# EAGLE board placas_leds_painel (EAGLE 7.7.0)
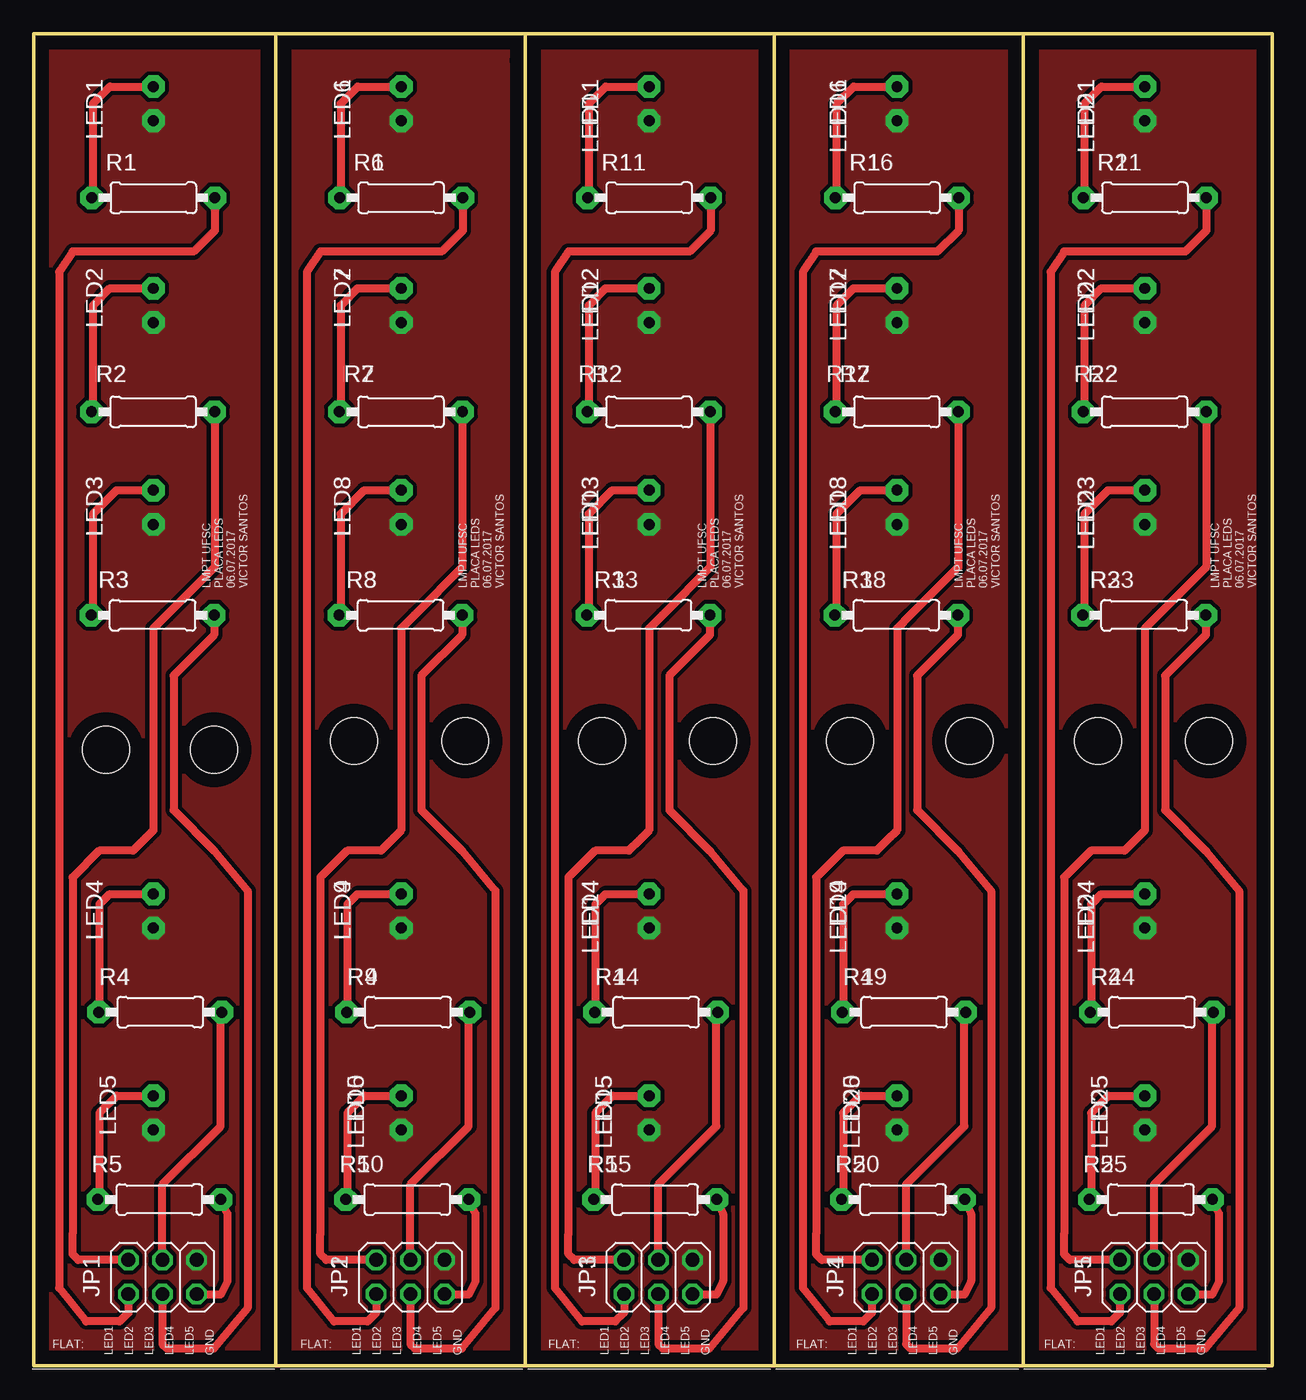
[diagram p0: board, top side]
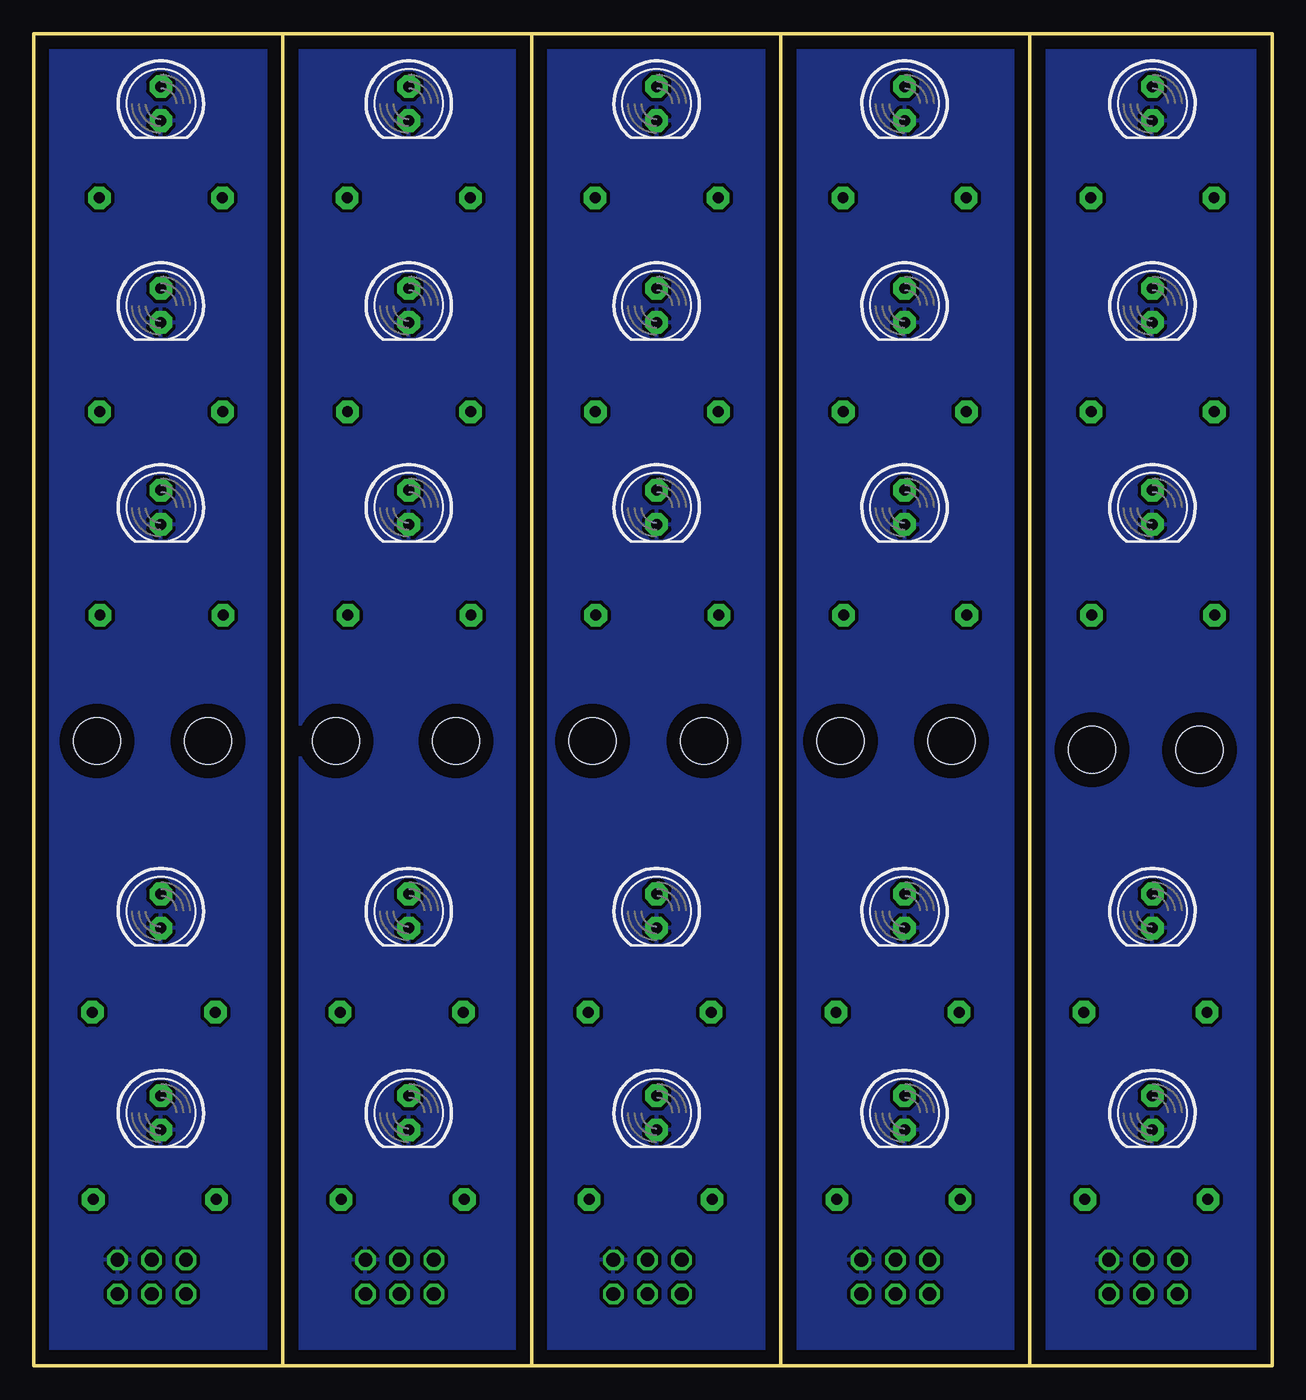
[diagram p1: board, bottom side, seen from below]

Size 92 x 99 mm. Coordinates in mm from the lower left corner, seen from the top.
Outline: 18,0 0,0 0,99 18,99
Outline: 18,0 36.5,0
Outline: 36.5,0 55,0
Outline: 55,0 73.5,0
Outline: 73.5,0 92,0 92,99 73.5,99
Outline: 18,99 37,99
Outline: 37,99 55,99
Outline: 55,99 73,99
Outline: 73,99 73.5,99
Outline: 18,99 18,0
Outline: 37,99 36.5,99 36.5,97 36.5,0
Outline: 36.5,0 55,0
Outline: 55,0 55,99
Outline: 73,99 73.5,99
Outline: 73.5,99 73.5,0
Copper layers (1*16): Top 0.035mm / dielectric 1.5mm / Bottom 0.035mm
Design rules "default": minimum track width 10mil, minimum drill 24mil, track to track 8mil, track to pad 8mil, pad to pad 8mil, via to via 8mil, smd to smd 8mil, copper to edge 40mil, drill to drill 8mil, minimum pad ring 10mil, minimum via ring 8mil, stop-mask expansion 4mil, vias tented up to drill 0mil, thermal gap 10mil
Holes 3.5 mm at 5.39,45.8 13.39,45.8 23.8,46.44 32.06,46.44 42.22,46.44 50.48,46.44 60.63,46.44 69.53,46.44 79.05,46.44 87.31,46.44

## Footprints (pad centres in the part's own frame; a part is rotated, then mirrored left to right if it is on the bottom)
2X03 = drill 1.016 octagon: 1 -2.54,-1.27; 2 -2.54,1.27; 3 0,-1.27; 4 0,1.27; 5 2.54,-1.27; 6 2.54,1.27
LED5MM = drill 0.813 pad 1.676 octagon: A -1.27,0; K 1.27,0
0207/9 = drill 0.813 pad 1.676 octagon: 1 -4.572,0; 2 4.572,0

## Placement (x,y rotation side)
JP1  [2X03]  9.57,6.61 0 top
JP2  [2X03]  27.98,6.61 0 top
JP3  [2X03]  46.4,6.61 0 top
JP4  [2X03]  64.81,6.61 0 top
JP5  [2X03]  83.23,6.61 0 top
LED1  [LED5MM]  8.89,93.8 270 bottom
LED2  [LED5MM]  8.89,78.8 270 bottom
LED3  [LED5MM]  8.89,63.8 270 bottom
LED4  [LED5MM]  8.89,33.8 270 bottom
LED5  [LED5MM]  8.89,18.8 270 bottom
LED6  [LED5MM]  27.3,93.8 270 bottom
LED7  [LED5MM]  27.3,78.8 270 bottom
LED8  [LED5MM]  27.3,63.8 270 bottom
LED9  [LED5MM]  27.3,33.8 270 bottom
LED10  [LED5MM]  27.3,18.8 270 bottom
LED11  [LED5MM]  45.72,93.8 270 bottom
LED12  [LED5MM]  45.72,78.8 270 bottom
LED13  [LED5MM]  45.72,63.8 270 bottom
LED14  [LED5MM]  45.72,33.8 270 bottom
LED15  [LED5MM]  45.72,18.8 270 bottom
LED16  [LED5MM]  64.14,93.8 270 bottom
LED17  [LED5MM]  64.14,78.8 270 bottom
LED18  [LED5MM]  64.14,63.8 270 bottom
LED19  [LED5MM]  64.14,33.8 270 bottom
LED20  [LED5MM]  64.14,18.8 270 bottom
LED21  [LED5MM]  82.55,93.8 270 bottom
LED22  [LED5MM]  82.55,78.8 270 bottom
LED23  [LED5MM]  82.55,63.8 270 bottom
LED24  [LED5MM]  82.55,33.8 270 bottom
LED25  [LED5MM]  82.55,18.8 270 bottom
R1  [0207/9]  8.89,86.8 180 top
R2  [0207/9]  8.87,70.9 180 top
R3  [0207/9]  8.84,55.78 0 top
R4  [0207/9]  9.41,26.28 0 top
R5  [0207/9]  9.34,12.36 0 top
R6  [0207/9]  27.3,86.8 180 top
R7  [0207/9]  27.29,70.9 180 top
R8  [0207/9]  27.25,55.78 0 top
R9  [0207/9]  27.82,26.28 0 top
R10  [0207/9]  27.75,12.36 0 top
R11  [0207/9]  45.72,86.8 180 top
R12  [0207/9]  45.7,70.9 180 top
R13  [0207/9]  45.67,55.78 0 top
R14  [0207/9]  46.24,26.28 0 top
R15  [0207/9]  46.17,12.36 0 top
R16  [0207/9]  64.14,86.8 180 top
R17  [0207/9]  64.11,70.9 180 top
R18  [0207/9]  64.08,55.78 0 top
R19  [0207/9]  64.66,26.28 0 top
R20  [0207/9]  64.58,12.36 0 top
R21  [0207/9]  82.55,86.8 180 top
R22  [0207/9]  82.53,70.9 180 top
R23  [0207/9]  82.5,55.78 0 top
R24  [0207/9]  83.07,26.28 0 top
R25  [0207/9]  83,12.36 0 top

## Library data of the parts
JP1-JP5 = pinhead
LED1-LED25 R1-R25 = adafruit

## Nets
GND: JP1.6 LED1.K LED2.K LED3.K LED4.K LED5.K
GND1: JP2.6 LED6.K LED7.K LED8.K LED9.K LED10.K
GND2: JP3.6 LED11.K LED12.K LED13.K LED14.K LED15.K
GND3: JP4.6 LED16.K LED17.K LED18.K LED19.K LED20.K
GND4: JP5.6 LED21.K LED22.K LED23.K LED24.K LED25.K
LED1: JP1.1 R1.1
LED2: JP1.2 R2.1
LED3: JP1.3 R3.2
LED4: JP1.4 R4.2
LED5: JP1.5 R5.2
LED6: JP2.1 R6.1
LED7: JP2.2 R7.1
LED8: JP2.3 R8.2
LED9: JP2.4 R9.2
LED10: JP2.5 R10.2
LED11: JP3.1 R11.1
LED12: JP3.2 R12.1
LED13: JP3.3 R13.2
LED14: JP3.4 R14.2
LED15: JP3.5 R15.2
LED16: JP4.1 R16.1
LED17: JP4.2 R17.1
LED18: JP4.3 R18.2
LED19: JP4.4 R19.2
LED20: JP4.5 R20.2
LED21: JP5.1 R21.1
LED22: JP5.2 R22.1
LED23: JP5.3 R23.2
LED24: JP5.4 R24.2
LED25: JP5.5 R25.2
N$1: LED2.A R2.2
N$2: LED6.A R6.2
N$3: LED7.A R7.2
N$4: LED8.A R8.1
N$5: LED9.A R9.1
N$6: LED10.A R10.1
N$7: LED1.A R1.2
N$8: LED3.A R3.1
N$9: LED4.A R4.1
N$10: LED5.A R5.1
N$11: LED11.A R11.2
N$12: LED12.A R12.2
N$13: LED13.A R13.1
N$14: LED14.A R14.1
N$15: LED15.A R15.1
N$16: LED16.A R16.2
N$17: LED17.A R17.2
N$18: LED18.A R18.1
N$19: LED19.A R19.1
N$20: LED20.A R20.1
N$21: LED21.A R21.2
N$22: LED22.A R22.2
N$23: LED23.A R23.1
N$24: LED24.A R24.1
N$25: LED25.A R25.1

## Tracks (layer width: path | path; a pad name or v marks a point on that pad's centre or on a via)
GND
  pour Bottom (isolate 0.254): -0.11,99.3 -0.11,-0.2 17.89,-0.2 17.89,99.3
  pour Top (isolate 0.305, no thermals): -0.11,99.3 -0.11,-0.2 17.89,-0.2 17.89,99.3
GND1
  pour Bottom (isolate 0.254): 18.3,99.3 18.3,-0.2 36.3,-0.2 36.3,99.3
  pour Top (isolate 0.305, no thermals): 18.3,99.3 18.3,-0.2 36.3,-0.2 36.3,99.3
GND2
  pour Bottom (isolate 0.254): 36.72,99.3 36.72,-0.2 54.72,-0.2 54.72,99.3
  pour Top (isolate 0.305, no thermals): 36.72,99.3 36.72,-0.2 54.72,-0.2 54.72,99.3
GND3
  pour Bottom (isolate 0.254): 55.13,99.3 55.13,-0.2 73.14,-0.2 73.14,99.3
  pour Top (isolate 0.305, no thermals): 55.13,99.3 55.13,-0.2 73.14,-0.2 73.14,99.3
GND4
  pour Bottom (isolate 0.254): 73.55,99.3 73.55,-0.2 91.55,-0.2 91.55,99.3
  pour Top (isolate 0.305, no thermals): 73.55,99.3 73.55,-0.2 91.55,-0.2 91.55,99.3
LED1
  Top 0.61: R1.1 13.46,84.37 11.89,82.8 2.89,82.8 1.89,81.3 1.89,5.8 3.89,3.3 6.39,3.3 7.03,3.94 JP1.1
LED2
  Top 0.61: R2.1 13.44,59.35 9.89,55.8 8.89,54.8 8.89,39.8 8.14,39.05 | 8.39,39.3 8.14,39.05 | 8.14,39.05 7.39,38.3 4.89,38.3 2.89,36.3 2.89,9.8 2.89,8.3 3.31,7.88 JP1.2
LED3
  Top 0.61: JP1.3 9.57,1.62 9.89,1.3 13.39,1.3 15.89,4.3 15.89,35.3 13.41,38.28 10.39,41.3 10.39,51.3 13.41,54.32 R3.2
LED4
  Top 0.61: JP1.4 9.57,13.48 13.89,17.8 13.89,26.19 R4.2
LED5
  Top 0.61: R5.2 13.91,12.28 14.39,11.3 14.39,6.3 13.89,5.3 12.15,5.3 JP1.5
LED6
  Top 0.61: R6.1 31.88,84.37 30.3,82.8 21.3,82.8 20.3,81.3 20.3,5.8 22.3,3.3 24.8,3.3 25.45,3.94 JP2.1
LED7
  Top 0.61: R7.1 31.86,59.35 28.3,55.8 27.3,54.8 27.3,39.8 26.55,39.05 | 26.8,39.3 26.55,39.05 | 26.55,39.05 25.8,38.3 23.3,38.3 21.3,36.3 21.3,9.8 21.3,8.3 21.73,7.88 JP2.2
LED8
  Top 0.61: JP2.3 27.98,1.62 28.3,1.3 31.8,1.3 34.3,4.3 34.3,35.3 31.83,38.28 28.8,41.3 28.8,51.3 31.83,54.32 R8.2
LED9
  Top 0.61: JP2.4 27.98,13.48 32.3,17.8 32.3,26.19 R9.2
LED10
  Top 0.61: R10.2 32.33,12.28 32.8,11.3 32.8,6.3 32.3,5.3 30.57,5.3 JP2.5
LED11
  Top 0.61: R11.1 50.29,84.37 48.72,82.8 39.72,82.8 38.72,81.3 38.72,5.8 40.72,3.3 43.22,3.3 43.86,3.94 JP3.1
LED12
  Top 0.61: R12.1 50.27,59.35 46.72,55.8 45.72,54.8 45.72,39.8 44.97,39.05 | 45.22,39.3 44.97,39.05 | 44.97,39.05 44.22,38.3 41.72,38.3 39.72,36.3 39.72,9.8 39.72,8.3 40.14,7.88 JP3.2
LED13
  Top 0.61: JP3.3 46.4,1.62 46.72,1.3 50.22,1.3 52.72,4.3 52.72,35.3 50.24,38.28 47.22,41.3 47.22,51.3 50.24,54.32 R13.2
LED14
  Top 0.61: JP3.4 46.4,13.48 50.72,17.8 50.72,26.19 R14.2
LED15
  Top 0.61: R15.2 50.74,12.28 51.22,11.3 51.22,6.3 50.72,5.3 48.98,5.3 JP3.5
LED16
  Top 0.61: R16.1 68.71,84.37 67.14,82.8 58.13,82.8 57.13,81.3 57.13,5.8 59.13,3.3 61.63,3.3 62.27,3.94 JP4.1
LED17
  Top 0.61: R17.1 68.69,59.35 65.14,55.8 64.14,54.8 64.14,39.8 63.38,39.05 | 63.63,39.3 63.38,39.05 | 63.38,39.05 62.63,38.3 60.13,38.3 58.13,36.3 58.13,9.8 58.13,8.3 58.55,7.88 JP4.2
LED18
  Top 0.61: JP4.3 64.81,1.62 65.14,1.3 68.64,1.3 71.14,4.3 71.14,35.3 68.66,38.28 65.64,41.3 65.64,51.3 68.66,54.32 R18.2
LED19
  Top 0.61: JP4.4 64.81,13.48 69.14,17.8 69.14,26.19 R19.2
LED20
  Top 0.61: R20.2 69.16,12.28 69.64,11.3 69.64,6.3 69.14,5.3 67.39,5.3 JP4.5
LED21
  Top 0.61: R21.1 87.12,84.37 85.55,82.8 76.55,82.8 75.55,81.3 75.55,5.8 77.55,3.3 80.05,3.3 80.69,3.94 JP5.1
LED22
  Top 0.61: R22.1 87.1,59.35 83.55,55.8 82.55,54.8 82.55,39.8 81.8,39.05 | 82.05,39.3 81.8,39.05 | 81.8,39.05 81.05,38.3 78.55,38.3 76.55,36.3 76.55,9.8 76.55,8.3 76.97,7.88 JP5.2
LED23
  Top 0.61: JP5.3 83.23,1.62 83.55,1.3 87.05,1.3 89.55,4.3 89.55,35.3 87.07,38.28 84.05,41.3 84.05,51.3 87.07,54.32 R23.2
LED24
  Top 0.61: JP5.4 83.23,13.48 87.55,17.8 87.55,26.19 R24.2
LED25
  Top 0.61: R25.2 87.57,12.28 88.05,11.3 88.05,6.3 87.55,5.3 85.81,5.3 JP5.5
N$1
  Top 0.61: R2.2 4.39,70.99 4.39,78.8 5.66,80.07 LED2.A
N$2
  Top 0.61: R6.2 22.8,86.87 22.8,93.8 24.07,95.07 LED6.A
N$3
  Top 0.61: R7.2 22.8,70.99 22.8,78.8 24.07,80.07 LED7.A
N$4
  Top 0.61: R8.1 22.8,55.9 22.8,63.3 24.57,65.07 LED8.A
N$5
  Top 0.61: R9.1 23.3,26.33 23.3,34.3 24.07,35.07 LED9.A
N$6
  Top 0.61: R10.1 23.3,12.48 23.3,18.8 24.57,20.07 LED10.A
N$7
  Top 0.61: R1.2 4.39,86.87 4.39,93.8 5.66,95.07 LED1.A
N$8
  Top 0.61: R3.1 4.39,55.9 4.39,63.3 6.16,65.07 LED3.A
N$9
  Top 0.61: R4.1 4.89,26.33 4.89,34.3 5.66,35.07 LED4.A
N$10
  Top 0.61: R5.1 4.89,12.48 4.89,18.8 6.16,20.07 LED5.A
N$11
  Top 0.61: R11.2 41.22,86.87 41.22,93.8 42.49,95.07 LED11.A
N$12
  Top 0.61: R12.2 41.22,70.99 41.22,78.8 42.49,80.07 LED12.A
N$13
  Top 0.61: R13.1 41.22,55.9 41.22,63.3 42.99,65.07 LED13.A
N$14
  Top 0.61: R14.1 41.72,26.33 41.72,34.3 42.49,35.07 LED14.A
N$15
  Top 0.61: R15.1 41.72,12.48 41.72,18.8 42.99,20.07 LED15.A
N$16
  Top 0.61: R16.2 59.63,86.87 59.63,93.8 60.91,95.07 LED16.A
N$17
  Top 0.61: R17.2 59.63,70.99 59.63,78.8 60.91,80.07 LED17.A
N$18
  Top 0.61: R18.1 59.63,55.9 59.63,63.3 61.41,65.07 LED18.A
N$19
  Top 0.61: R19.1 60.13,26.33 60.13,34.3 60.91,35.07 LED19.A
N$20
  Top 0.61: R20.1 60.13,12.48 60.13,18.8 61.41,20.07 LED20.A
N$21
  Top 0.61: R21.2 78.05,86.87 78.05,93.8 79.32,95.07 LED21.A
N$22
  Top 0.61: R22.2 78.05,70.99 78.05,78.8 79.32,80.07 LED22.A
N$23
  Top 0.61: R23.1 78.05,55.9 78.05,63.3 79.82,65.07 LED23.A
N$24
  Top 0.61: R24.1 78.55,26.33 78.55,34.3 79.32,35.07 LED24.A
N$25
  Top 0.61: R25.1 78.55,12.48 78.55,18.8 79.82,20.07 LED25.A

## Text on the board
tNames: FLAT: | LED1 | LED2 | LED3 | LED4 | LED5 | GND | FLAT: | LED1 | LED2 | LED3 | LED4 | LED5 | GND | FLAT: | LED1 | LED2 | LED3 | LED4 | LED5 | GND | FLAT: | LED1 | LED2 | LED3 | LED4 | LED5 | GND | FLAT: | LED1 | LED2 | LED3 | LED4 | LED5 | GND
_tNames: LED1 | LED1 | LED1 | LED1 | LED1 | R1 | R1 | R1 | R1 | R1 | LED2 | LED2 | LED2 | LED2 | LED2 | R2 | R2 | R2 | R2 | R2 | LED3 | LED3 | LED3 | LED3 | LED3 | R3 | LMPT UFSC / PLACA LEDS / 06.07.2017 / VICTOR SANTOS | R3 | LMPT UFSC / PLACA LEDS / 06.07.2017 / VICTOR SANTOS | R3 | LMPT UFSC / PLACA LEDS / 06.07.2017 / VICTOR SANTOS | R3 | LMPT UFSC / PLACA LEDS / 06.07.2017 / VICTOR SANTOS | R3 | LMPT UFSC / PLACA LEDS / 06.07.2017 / VICTOR SANTOS | LED4 | LED4 | LED4 | LED4 | LED4 | R4 | R4 | R4 | R4 | R4 | LED5 | LED5 | LED5 | LED5 | LED5 | R5 | R5 | R5 | R5 | R5 | JP1 | JP1 | JP1 | JP1 | JP1